# Altium PCB Revolution.PcbDoc
Units mil, origin at the board's own origin, x right, y up, seen from the top; angles counter-clockwise.
Board outline 1417.32 x 1417.32 mil, 4 copper layers (Top Layer, Power, Ground, Bottom Layer), stack 89.2 mil thick; 88 components, 82 nets, 359 pads, 101 vias.
Unrouted connection lines stored in the file: 44.
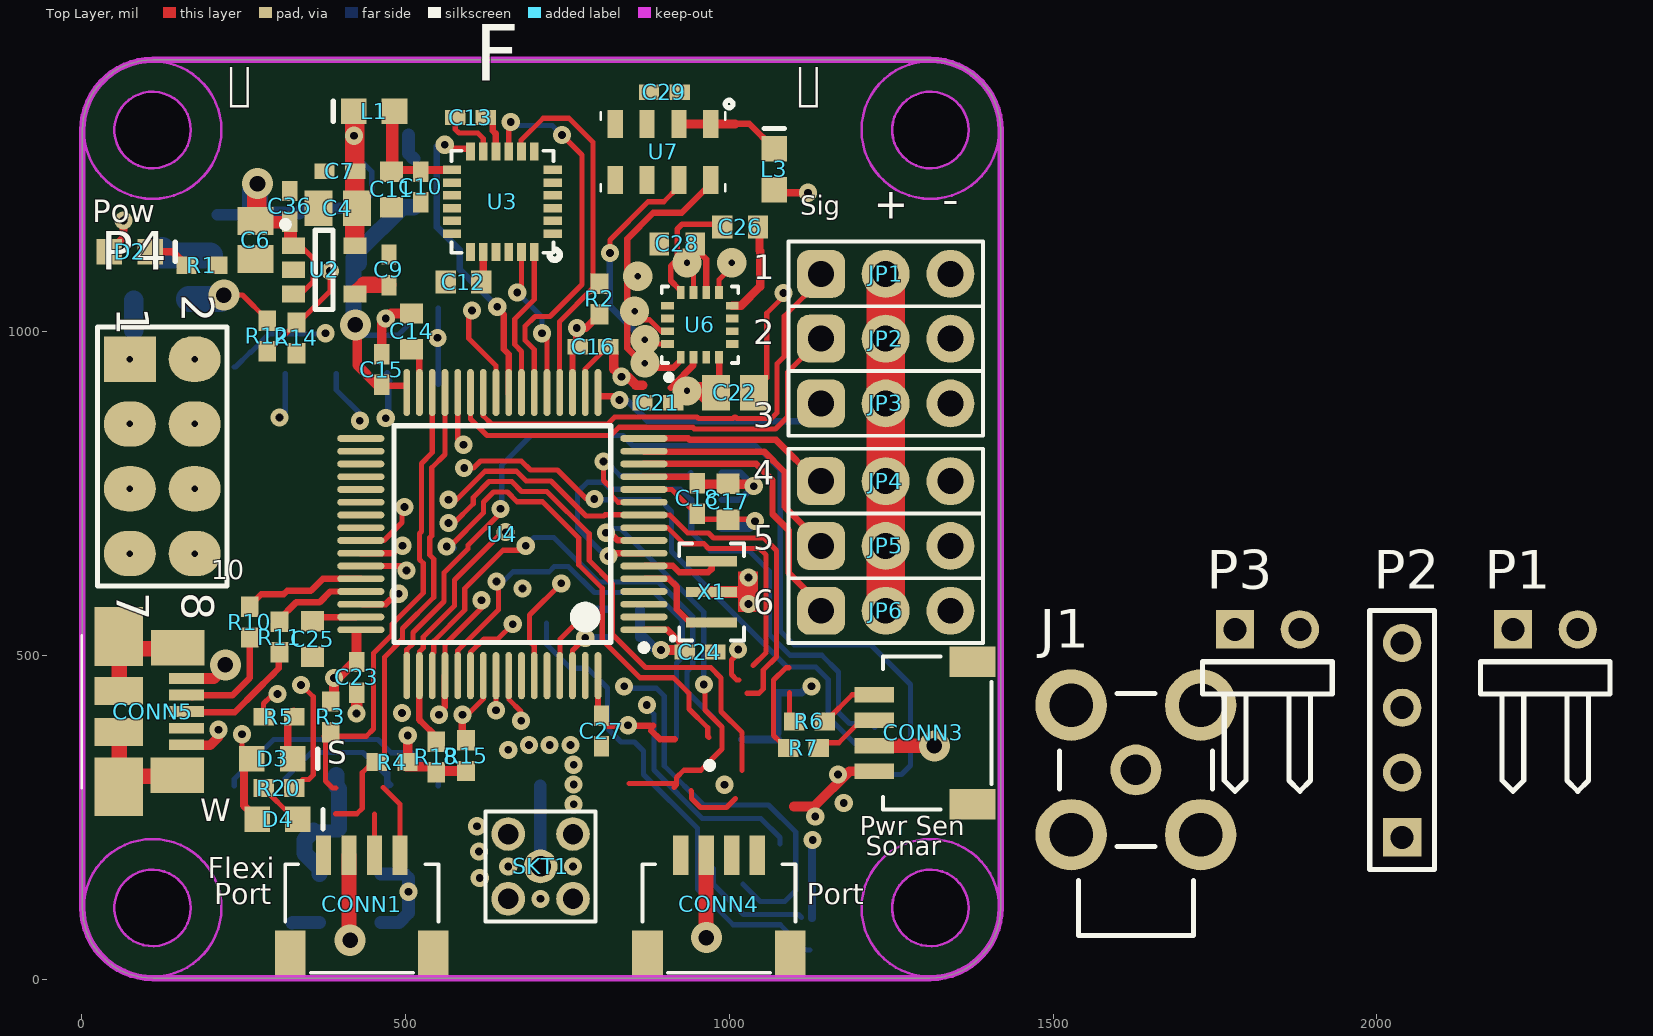
[diagram p0: Top Layer view]
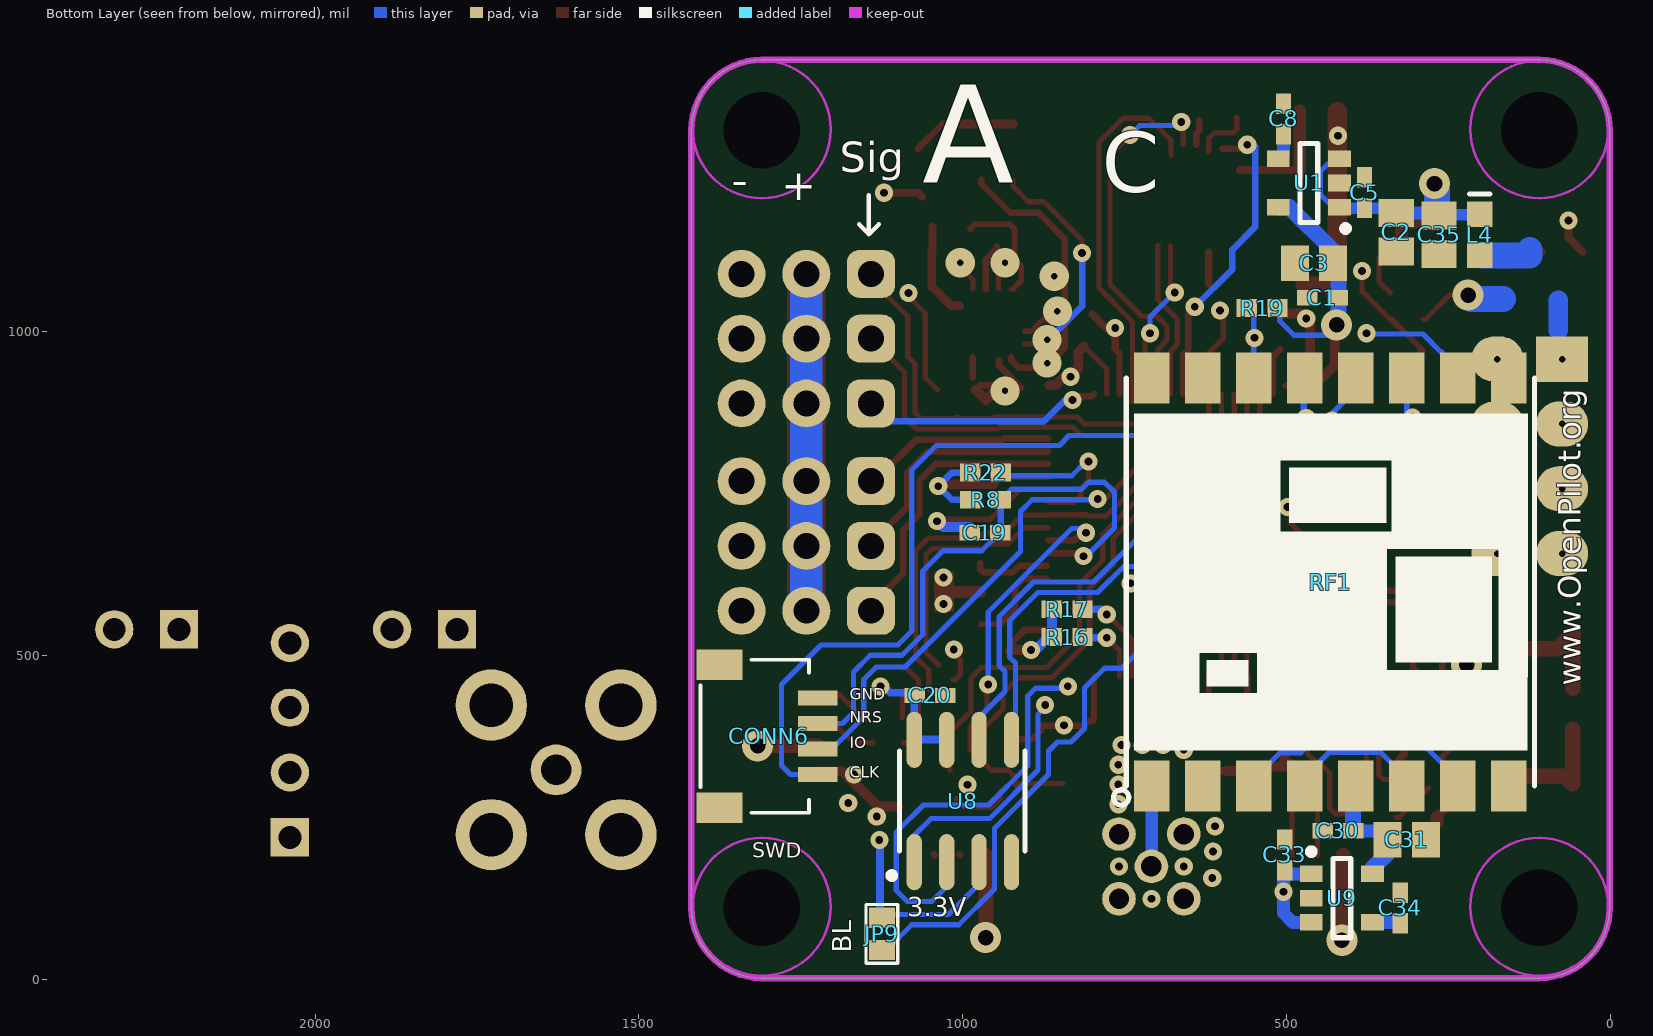
[diagram p1: Bottom Layer view, seen from below]
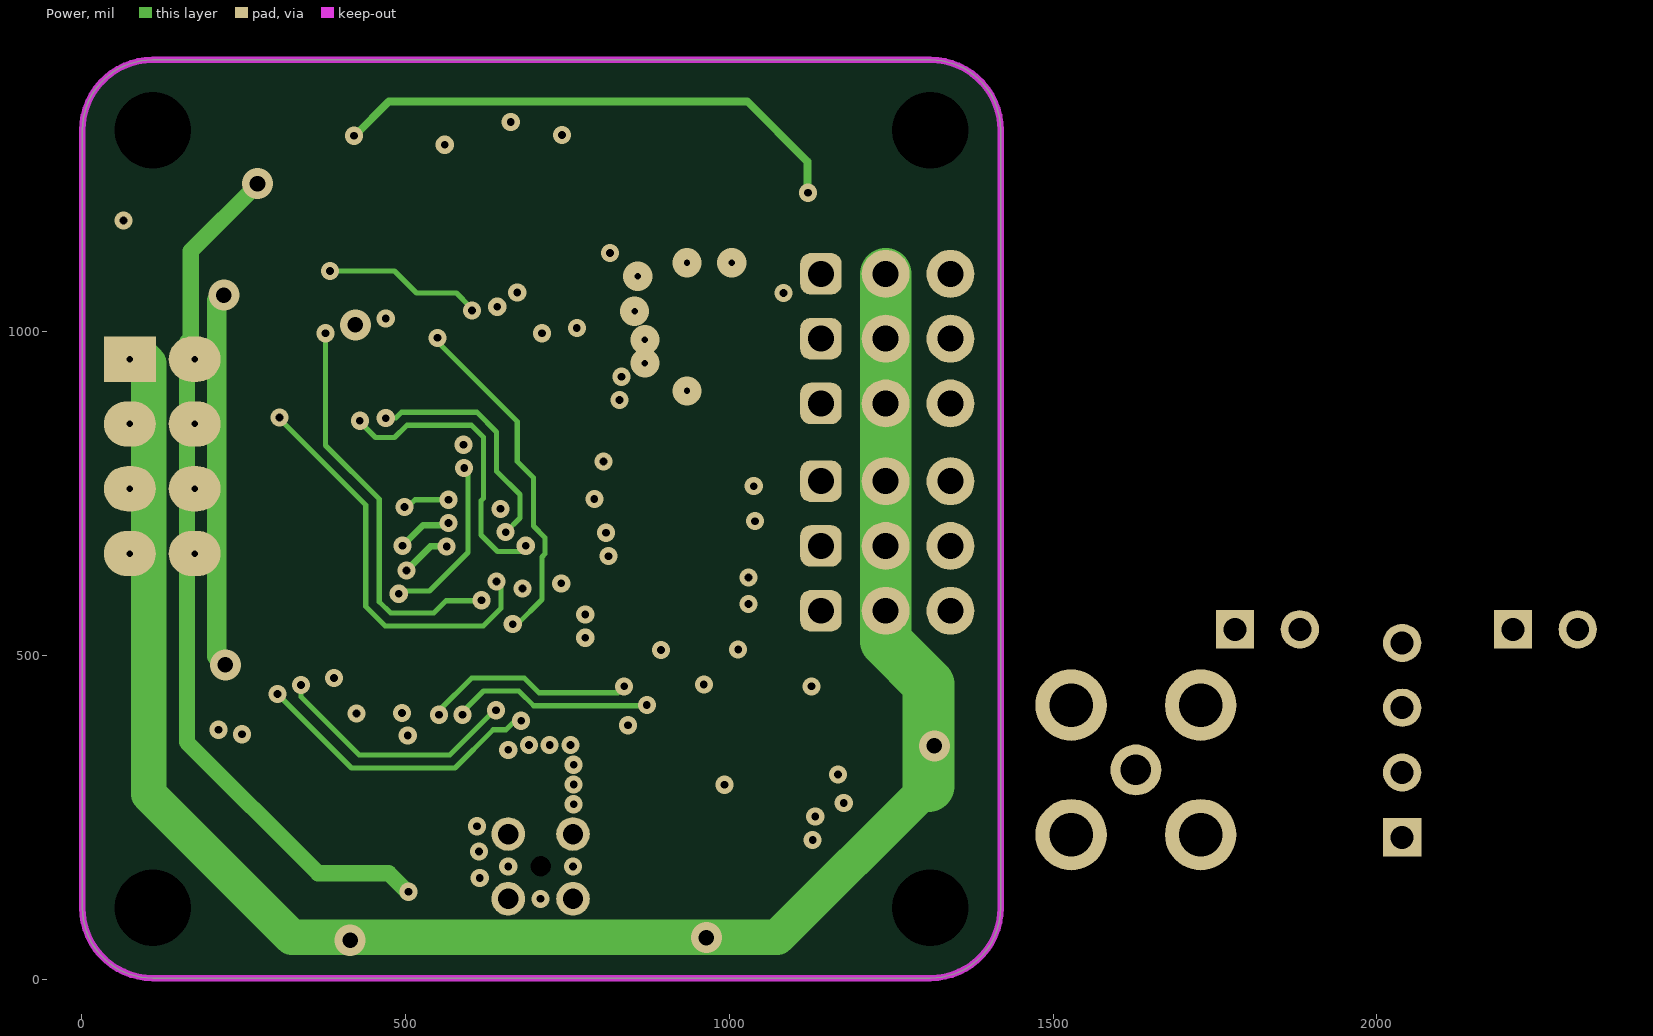
[diagram p2: Power]
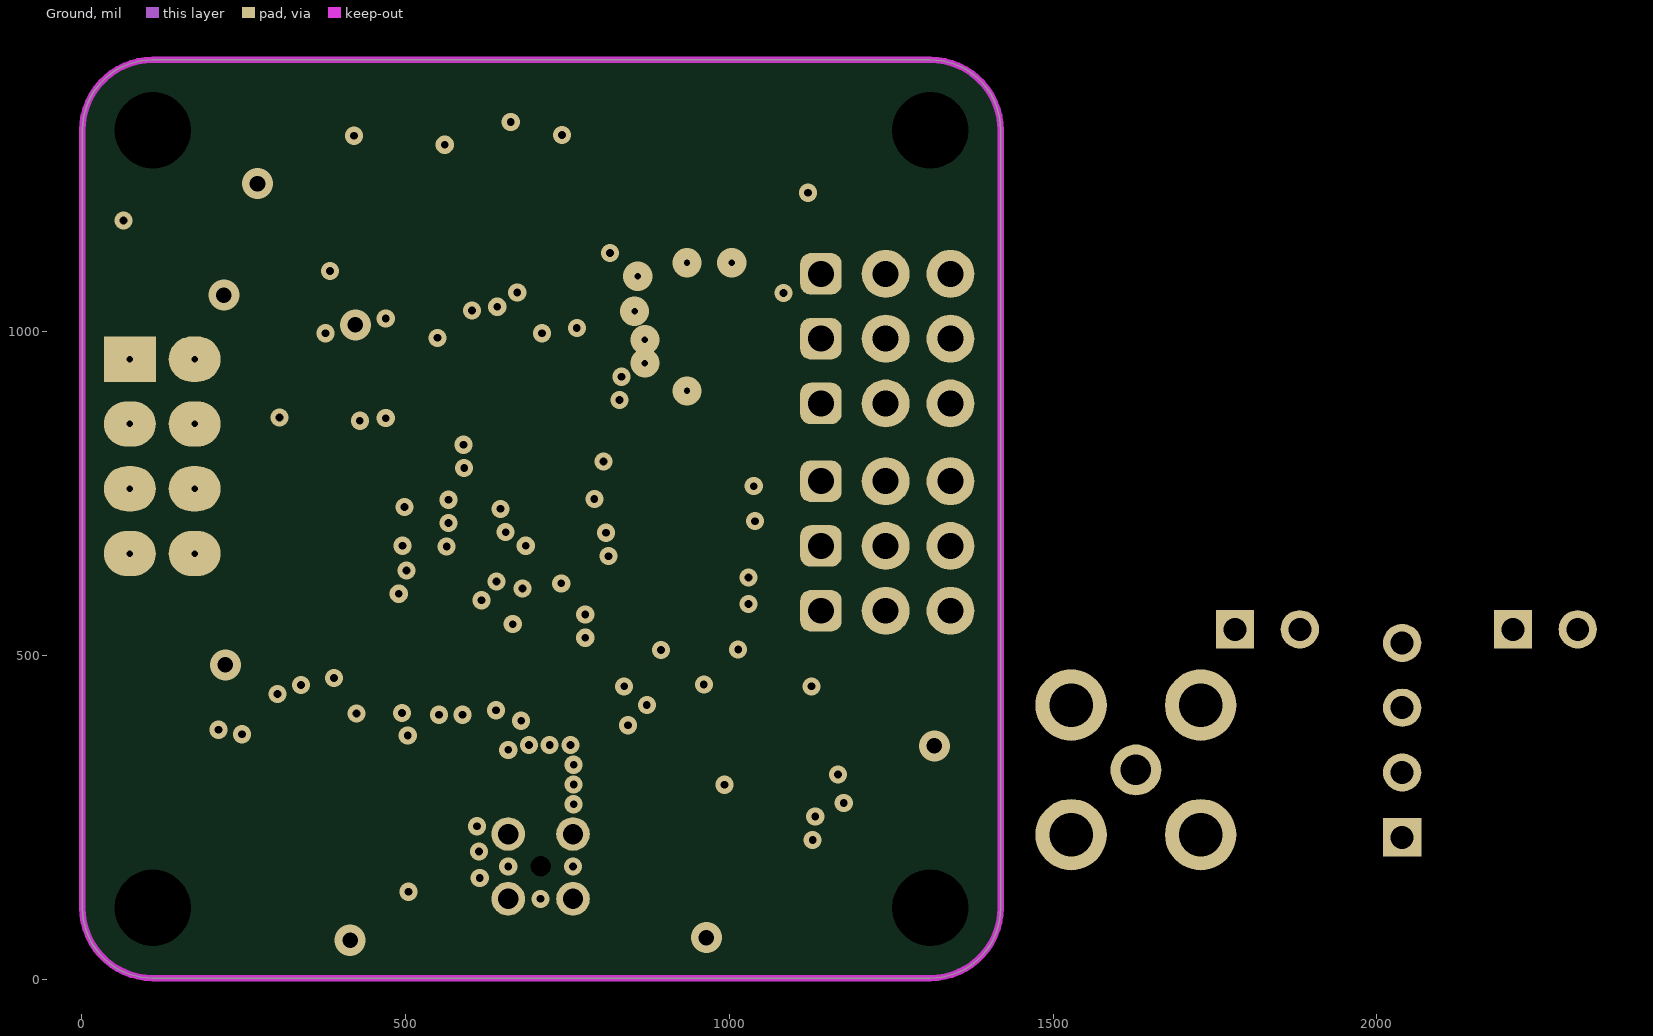
[diagram p3: Ground]
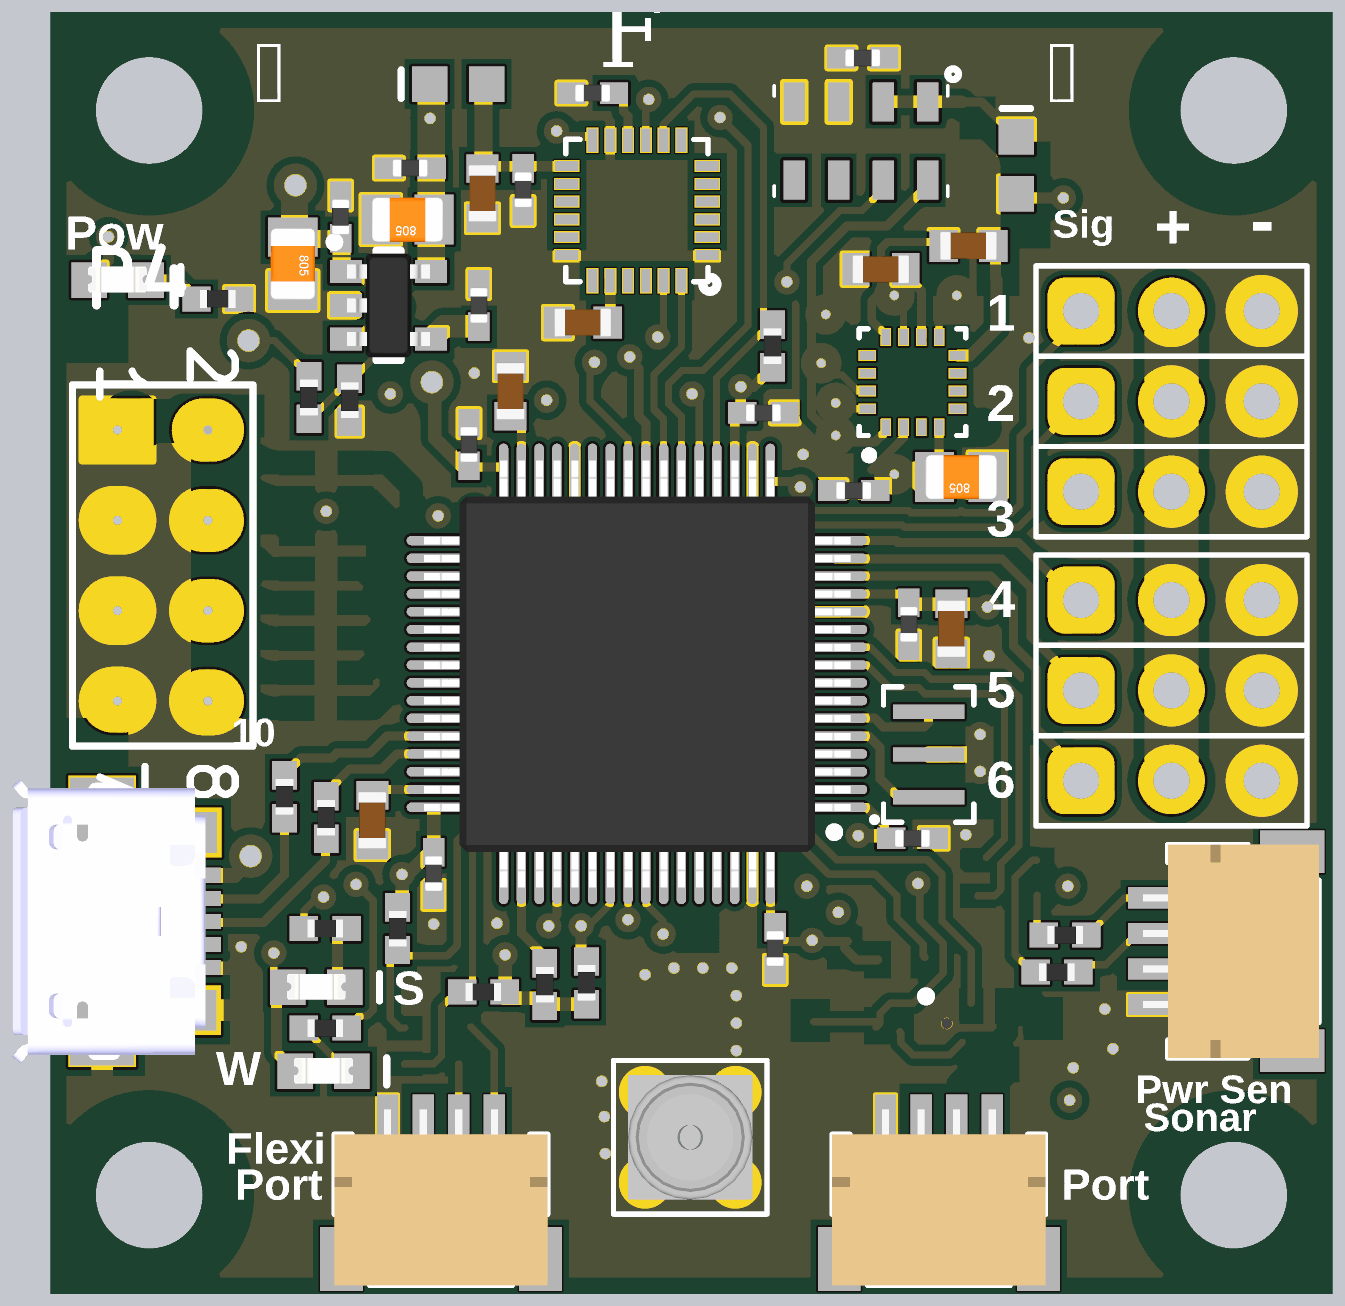
[diagram p4: 3D render of the assembled board from above, using the file's embedded part models]
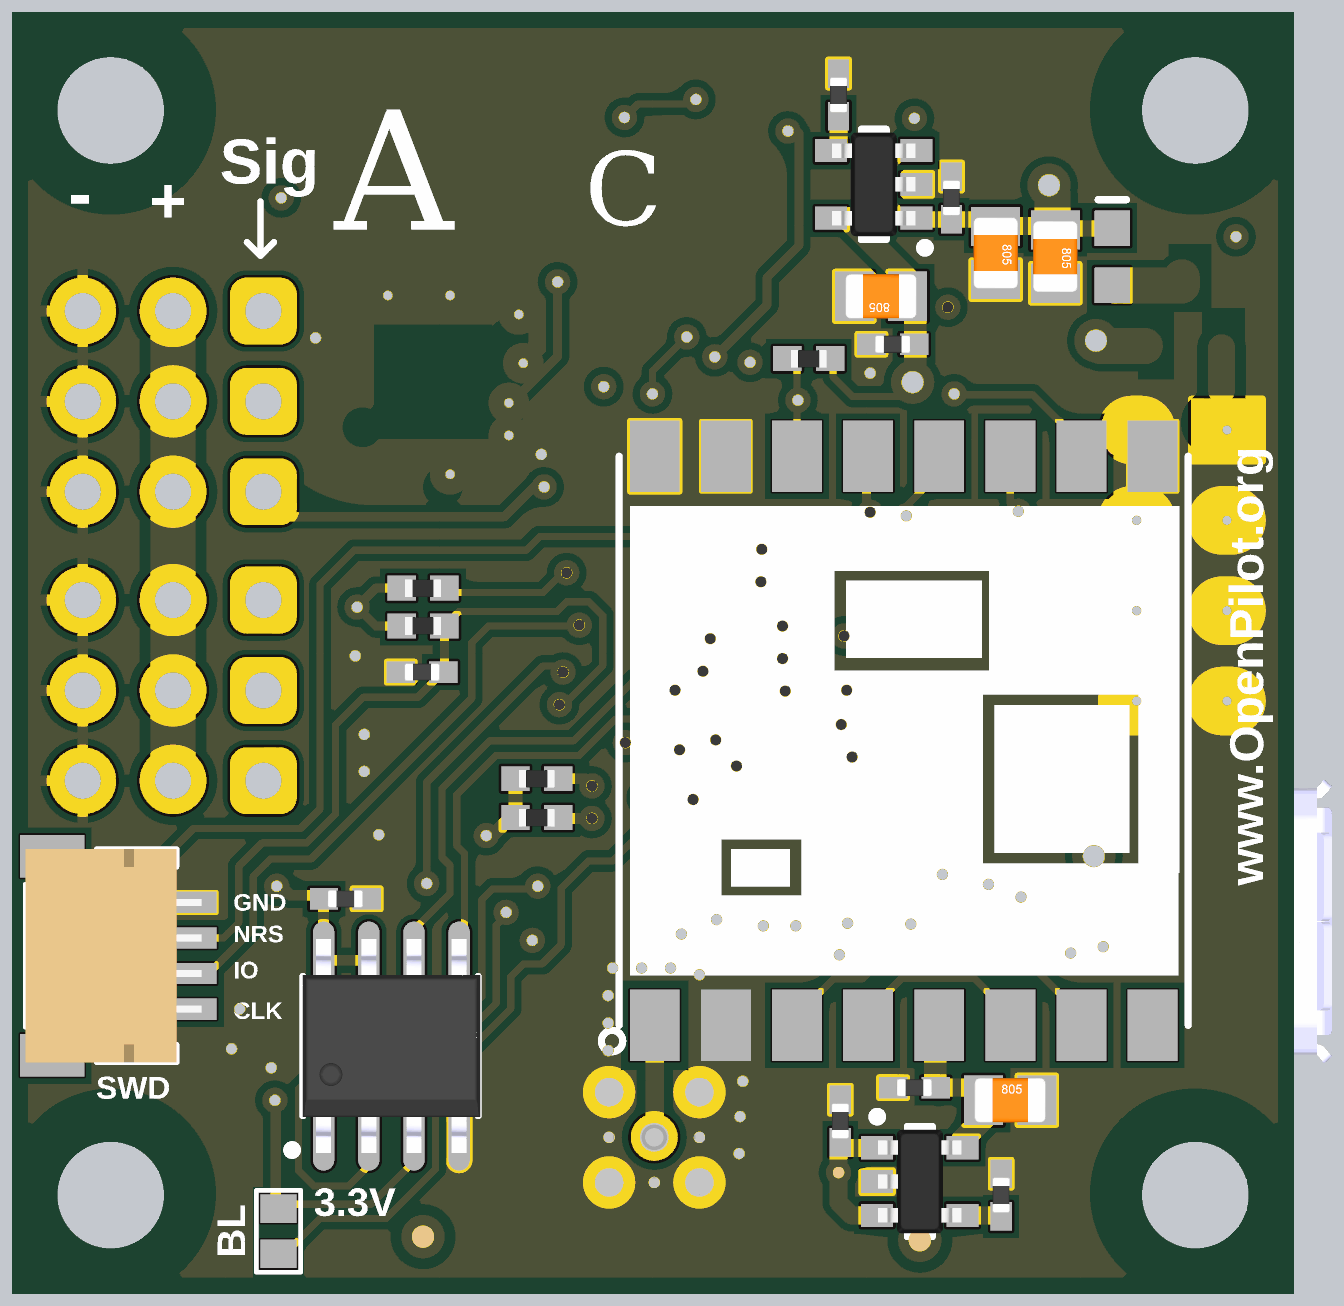
[diagram p5: 3D render of the assembled board from below, using the file's embedded part models]

## Layer stack, top to bottom
Top Solder: solder mask 0.4, Solder Resist, Dk 3.5
Top Layer: signal copper 1.4
Dielectric1: core 58.4, FR-4, Dk 4.8
Power: signal copper 1.4
Dielectric3: prepreg 12.6, FR-4, Dk 4.8
Ground: signal copper 1.4
Dielectric2: core 12.6, FR-4, Dk 4.8
Bottom Layer: signal copper 1.4
Bottom Solder: solder mask 0.4, Solder Resist, Dk 3.5

## Board outline
1.73,110 ccw(c110,110) 110,1.73 1310.79,1.73 ccw(c1310.79,110) 1419.06,110 1419.06,1310.79 ccw(c1310.79,1310.79) 1310.79,1419.06 110,1419.06 ccw(c110,1310.79) 1.73,1310.79

## Design rules (kind name [scope] priority, off if disabled: settings)
AcuteAngle [All] p1: minimum=6.00000000000000E+0001 checktracksonly=FALSE
Clearance CPWG [InNet('ANT') vs InPolygon] p1: gap=10
Clearance Clearance_osc [InNet('GND') vs InNet('OSC_IN') or InNet('OSC_OUT')] p2: gap=15
Clearance "Power Layer Pull Back" [OnLayer('Power') vs OnLayer('Keep-Out Layer')] p3: gap=30
Clearance Clearance_outline [All vs OnLayer('Keep-Out Layer')] p4: gap=12
Clearance "PWR Layer clearance" [All vs OnLayer('Power')] p5: gap=12
Clearance "VCC_UNREG Pour Clearance" [(InNamedPolygon('Top Layer-GND') OR InNamedPolygon('Bottom Layer-GND')) vs (InNet('VCC_UNREG'))] p6: gap=12
Clearance "Small Part Clearance Poly" [(HasFootprint('IMU-3000') OR HasFootprint('LPCC-16')) vs InPolygon] p7: gap=8
Clearance "Small Part Clearance" [(HasFootprint('IMU-3000') OR HasFootprint('LPCC-16'))] p8: gap=6
Clearance [All] p9: gap=8
ComponentClearance ComponentClearance_servo_headers [InComponent('JP1') or InComponent('JP2') or InComponent('JP3') or InComponent('JP4') or InComponent('JP5') or InComponent('JP6')] p1: gap=5 collisioncheckmode=3 verticalgap=10 showdistances=FALSE
ComponentClearance [All] p2: gap=10 collisioncheckmode=3 verticalgap=10 showdistances=FALSE
DiffPairsRouting [All] p1: maxlimit=20 minlimit=6 mostfreqgap=10 toplayer_minwidth=15 toplayer_maxwidth=15 toplayer_prefwidth=15 midlayer1_mingap=10 midlayer1_maxgap=10 midlayer1_minwidth=15 midlayer1_maxwidth=15 midlayer1_prefwidth=15 midlayer2_mingap=10 midlayer2_maxgap=10 midlayer2_minwidth=15 midlayer2_maxwidth=15 midlayer2_prefwidth=15 bottomlayer_minwidth=15 bottomlayer_maxwidth=15 bottomlayer_prefwidth=15 maxuncoupledlength=500
HoleSize [All] p1: absolutevalues=TRUE maxlimit=1000 minlimit=12 maxpercent=80.000 minpercent=20.000
MinimumAnnularRing [All] p1: minimumring=8
MinimumSolderMaskSliver MinimumSolderMaskSliver_FIL1-3 [InComponent('FIL1') or InComponent('FIL2') or InComponent('FIL3')] p1: minsoldermaskwidth=1
MinimumSolderMaskSliver [All] p2: minsoldermaskwidth=3
PlaneClearance [All] p1: clearance=15
PlaneConnect [All] p1: planeconnectstyle=Direct reliefexpansion=20 reliefentries=4 reliefconductorwidth=10 reliefairgap=10
PolygonConnect PolygonConnect_Headers [(HasFootprint('SIP3 - 0.1')) vs IsNamedPolygon('Bottom Layer-GND')] p1: connectstyle=Relief reliefconductorwidth=12 reliefentries=4 polygonreliefangle="90 Angle" airgapwidth=10
PolygonConnect PolygonConnect_usb [HasFootprint('Micro_USB')] p2: connectstyle=Relief reliefconductorwidth=24 reliefentries=4 polygonreliefangle="90 Angle" airgapwidth=10
PolygonConnect [All] p3: connectstyle=Direct reliefconductorwidth=12 reliefentries=4 polygonreliefangle="90 Angle" airgapwidth=10
RoutingVias [All] p1: holewidth=12 width=28 viastyle="Through Hole" minholewidth=12 minwidth=28 maxholewidth=28 maxwidth=50
SilkToSilkClearance SilkToSilkClearance_text [IsText] p1: silktosilkclearance=0
SilkToSilkClearance [All] p2: silktosilkclearance=4
SilkToSolderMaskClearance SilkscreenOverComponentPads [IsPad] p1: minsilkscreentomaskgap=2 clearancetoexposedcopper=TRUE
SolderMaskExpansion [All] p1: expansion=3
Width [All] p1: maxlimit=400 minlimit=8 preferedwidth=10
22 further rules are at their usual default settings.

## Classes and differential pairs
differential pair USB_R: +USB_R_P -USB_R_N

## Components (designator, comment, footprint, x,y, rotation, side; value= is the part's Value field where it differs from the comment)
C1 "10n" CAP402N 445,1052 r0 bottom
C2 "Cap805" CAP805L#1 331,1153 r270 bottom
C3 "Cap805" CAP805L#2 458,1105 r0 bottom
C4 "Cap805" CAP805L#2 396,1190 r180 top
C5 "10n" CAP402N 380,1214 r90 bottom
C6 "Cap805" CAP805L#2 269,1141 r270 top
C7 "10n" CAP402N 399,1247 r180 top
C8 "10n" CAP402N 505,1328 r90 bottom
C9 "10n" CAP402N 475,1095 r90 top
C10 "Cap402" CAP402N 524,1223 r90 top
C11 "Cap603" CAP603L#1 479,1219 r270 top
C12 "Cap603" CAP603L#1 590,1076 r0 top
C13 "Cap402" CAP402N 601,1330 r180 top
C14 "Cap603" CAP603L#1 510,1000 r270 top
C15 "Cap402" CAP402N 464,941 r90 top
C16 "Cap402" CAP402N 790,976 r180 top
C17 "Cap603" CAP603L#1 998,737 r90 top
C18 "10n" CAP402N 951,742 r270 top
C19 "Cap402" CAP402N 966,689 r180 bottom
C20 "Cap402" CAP402N 1051,438 r0 bottom
C21 "Cap402" CAP402N 890,890 r180 top
C22 "Cap805" CAP805L#2 1009,905 r180 top
C23 "Cap402" CAP402N 425,466 r270 top
C24 "Cap402" CAP402N 955,505 r180 top
C25 "Cap603" CAP603L#1 357,525 r90 top
C26 "Cap603" CAP603L#1 1017,1161 r0 top
C27 "Cap402" CAP402N 803,383 r270 top
C28 "Cap603" CAP603L#2 920,1135 r180 top
C29 "Cap402" CAP402N 900,1369 r180 top
C30 "10n" CAP402N 421,229 r0 bottom
C31 "Cap805" CAP805L#2 315,215 r180 bottom
C33 "Cap402" CAP402N 503,192 r270 bottom
C34 "10n" CAP402N 325,110 r90 bottom
C35 "Cap805" CAP805L#1 265,1149 r270 bottom
C36 "10n" CAP402N 322,1193 r90 top
CONN1 "Flexi Port" "JST SH 4 Pin Side Entry" 433.07,10 r0 top locked
CONN3 "Current / Volt Sens & Sonar" "JST SH 4 Pin Side Entry" 1405,380 r90 top
CONN4 "Main USART" "JST SH 4 Pin Side Entry" 984.25,10 r0 top locked
CONN5 "Micro USB B" Micro_USB 58,413 r270 top
CONN6 "SWD" "JST SH 4 Pin Side Entry" 1405,375 r270 bottom
D2 "Green" LED603N 75,1123 r180 top
D3 "STAT" LED603N 295,340 r180 top
D4 "WARN" LED603N 303,247 r180 top
J1 "COAX-F" MCX5.08-H5 1628,323 r90 top
JP1 "Servo out 1" "SIP3 - 0.1" 1141.73,1088.73 r0 top locked
JP2 "Servo out 2" "SIP3 - 0.1" 1141.73,988.73 r0 top locked
JP3 "Servo out 3" "SIP3 - 0.1" 1141.73,888.73 r0 top locked
JP4 "Servo out 4" "SIP3 - 0.1" 1141.73,768.73 r0 top locked
JP5 "Servo out 5 & Govenor Input" "SIP3 - 0.1" 1141.73,668.73 r0 top locked
JP6 "Servo out 6" "SIP3 - 0.1" 1141.73,568.73 r0 top locked
JP9 "SBL" "TOUCH JMP 2PAD" 1125,70 r0 bottom
L1 "FB 300mA" IND603N 452,1340 r0 top
L3 "FB 300mA" IND603N 1070,1250 r270 top
L4 "FB 300mA" IND603N 202,1149 r270 bottom
P1 "Header 2H" HDR1X2H 2210,540 r0 top
P2 "Header 4" HDR1X4 2039,219 r90 top
P3 "Header 2H" HDR1X2H 1781,540 r0 top
P4 "Header 4X2" HDR2X4 75,957 r270 top
R1 "Res402" RES402N 186,1102 r180 top
R2 "Res402" RES402N 800,1050 r90 top
R3 "Res402" RES402N 385,405 r90 top
R4 "Res402" RES402N 480,335 r0 top
R5 "Res402" RES402N 305,405 r180 top
R6 "Res402" RES402N 1124,398 r0 top
R7 "Res402" RES402N 1115,357 r0 top
R8 "Res402" RES402N 965,740 r0 bottom
R10 "Res402" RES402N 260,551 r270 top
R11 "Res402" RES402N 306,528 r270 top
R12 "Res402" RES402N 287,993 r270 top
R14 "Res402" RES402N 332,990 r90 top
R15 "Res402" RES402N 594,345 r90 top
R16 "Res402" RES402N 839,528 r180 bottom
R17 "Res402" RES402N 839,571 r180 bottom
R18 "Res402" RES402N 548,343 r90 top
R19 "Res402" RES402N 538,1036 r180 bottom
R20 "Res402" RES402N 305,295 r0 top
R22 "Res402" RES402N 965,782 r180 bottom
RF1 "RFM22B-S2" RFM22-S2 432.89,613 r90 bottom locked
SKT1 "MMCX Thru hole" MMCX_SOCKET 709,174 r90 top
U1 "REG113NA-3.3" SOT23-5L 466,1229 r0 bottom
U2 "REG113NA-3.3" SOT23-5L 375,1095 r0 top
U3 "MPU-6000" IMU-3000 650,1200 r180 top
U4 "STM32F405RGT6" "STM32 64 Lead" 650,687 r180 top
U6 "HMC5883L" LPCC-16 955,1010 r90 top
U7 "Pressure Sensor" MS5611-01BA03 898,1277 r270 top
U8 "Flash 16Mbits" SOIC8_N 1000,275 r90 bottom
U9 "REG113NA-3.3" SOT23-5L 415,125 r180 bottom
X1 "8Mhz Ceralock" "CERALOCK 8Mhz" 973,597.76 r90 top

## Footprints (in the part's own frame and the unit in brackets; to place one, negate y for a bottom-side part, rotate by r counter-clockwise, add the part's x,y. Pads: shape width x height; smd on the part's side, far side on the other; paste and mask are expansions set on the pad)
CAP402N [mm] "Chip Capacitor, Body 1.0x0.5mm, IPC Medium Density"
  rect 0.8x0.6 smd: 1(-0.6,0) 2(0.6,0)
  body extent -0.5,-0.25 0.5,0.25, height 0.6
CAP603L#1 [mm] "Chip Capacitor, Body 1.6x0.8mm, IPC High Density"
  rect 0.8x0.9 smd: 1(-0.7,0) 2(0.7,0)
  body extent -0.8,-0.4 0.8,0.4, height 0.77
CAP603L#2 [mm] "Chip Capacitor, Body 1.6x0.8mm, IPC High Density"
  rect 0.762x0.9 smd: 1(-0.7,0) 2(0.7,0)
  body extent -0.8,-0.4 0.8,0.4, height 0.77
CAP805L#1 [mm] "Chip Capacitor, Body 2.0x1.3mm, IPC High Density"
  rect 1.1x1.38 smd: 1(-0.75,0) 2(0.75,0)
  body extent -1,-0.62 1,0.63, height 0.78
CAP805L#2 [mm] "Chip Capacitor, Body 2.0x1.3mm, IPC High Density"
  rect 1.1x1.4 smd: 1(-0.75,0) 2(0.75,0)
  body extent -1,-0.62 1,0.63, height 0.78
"CERALOCK 8Mhz" [mm] "Digikey 490-1195-1-ND"
  rect 0.4x2 smd: 1(-1.2,0) 2(1.2,0) 3(0,0)
  silkscreen extent -1.91,-1.27 1.91,1.58, body extent -1.78,-1.14 1.78,1.14, height 0.5
HDR1X2H [mm] "Connector; Header; 2 Position; Right Angle"
  rect 1.5x1.5 hole 0.9: 1(0,0)
  round 1.5 hole 0.9: 2(2.54,0)
  silkscreen extent -1.27,-6.35 3.81,-1.27
HDR1X4 [mm] "Connector; Header; 4 Position"
  rect 1.5x1.5 hole 0.9: 1(0,0)
  round 1.5 hole 0.9: 2(2.54,0) 3(5.08,0) 4(7.62,0)
  silkscreen extent -1.27,-1.27 8.89,1.27
HDR2X4 [mil] "Connector; Header; 4x2 Position"
  rect 70x80 hole 10: 1(0,0)
  oval 70x80 hole 10: 2(0,100) 3(100,0) 4(100,100) 5(200,0) 6(200,100) 7(300,0) 8(300,100)
  silkscreen extent -50,-50 350,150
IMU-3000 [mm]
  rect 0.711x0.337 smd paste-0.03 mask+0.04: 1(-1.975,1.25) 2(-1.975,0.75) 3(-1.975,0.25) 4(-1.975,-0.25) 5(-1.975,-0.75) 6(-1.975,-1.25) 13(1.975,-1.25) 14(1.975,-0.75) 15(1.975,-0.25) 16(1.975,0.25) 17(1.975,0.75) 18(1.975,1.25)
  rect 0.337x0.711 smd paste-0.03 mask+0.04: 7(-1.25,-1.975) 8(-0.75,-1.975) 9(-0.25,-1.975) 10(0.25,-1.975) 11(0.75,-1.975) 12(1.25,-1.975) 19(1.25,1.975) 20(0.75,1.975) 21(0.25,1.975) 22(-0.25,1.975) 23(-0.75,1.975) 24(-1.25,1.975)
  silkscreen extent -2.25,-2 2,2.27, body extent -2,-2 2,2, height 0.95
IND603N [mm] "Chip Inductor, Body 1.6x0.8mm, IPC Medium Density"
  rect 1x1 smd: 1(-0.8,0) 2(0.8,0)
  silkscreen extent -1.6,-0.4 -1.6,0.4, body extent -0.87,-0.48 0.87,0.48, height 0.71
"JST SH 4 Pin Side Entry" [mm] "SM04B-SRSS-TB"
  rect 1.2x1.8 smd paste+0 mask+0.051: 0(-2.8,0.75) 0(2.8,0.75)
  rect 0.6x1.55 smd paste+0 mask+0.051: 1(-1.5,4.6) 2(-0.5,4.6) 3(0.5,4.6) 4(1.5,4.6)
  silkscreen extent -3,0 3,4.25, body extent -3,0 3,4.95, height 2.92
LED603N [mm] "Chip LED, Body 1.6x0.8mm, IPC Medium Density"
  rect 1x1 smd: 1(-0.8,0) 2(0.8,0)
  silkscreen extent -1.78,-0.38 -1.78,0.38, body extent -0.82,-0.38 0.82,0.34, height 0.68
LPCC-16 [mm] "Honeywell 16 lead LPCC pakcage"
  rect 0.5x0.3 smd paste-0.025 mask+0.056: 1(-1.27,0.75) 2(-1.27,0.25) 4(-1.27,-0.75) 9(1.27,-0.75) 10(1.27,-0.25) 11(1.27,0.25) 12(1.27,0.75)
  rect 0.5x0.3 smd paste-0.025 mask+0.064: 3(-1.27,-0.25)
  rect 0.3x0.5 smd paste-0.025 mask+0.056: 5(-0.75,-1.27) 6(-0.25,-1.27) 7(0.25,-1.27) 8(0.75,-1.27) 13(0.75,1.27) 14(0.25,1.27) 15(-0.25,1.27) 16(-0.75,1.27)
  silkscreen extent -2.16,-1.5 1.5,1.5, body extent -1.5,-1.5 1.5,1.5, height 0.9
MCX5.08-H5 [mm] "Connector; RF Coaxial, MCX, Thru-Hole; 5 Position; Right-Angle"
  round 2 hole 1.2: 1(0,0)
  round 2.8 hole 1.7: 2(-2.54,-2.54) 3(2.54,-2.54) 4(2.54,2.54) 5(-2.54,2.54)
  silkscreen extent -6.5,-3 3,3
Micro_USB [mm] "Digikey WM17141CT-ND"
  rect 2.3x1.9 smd paste-0.051: 0(-2.946,0) 0(2.946,0)
  rect 1.4x2.1 smd paste-0.127: 0(-2.5,2.311) 0(2.5,2.286)
  rect 1.1x1.9 smd paste-0.203: 0(-0.8,0) 0(0.8,0)
  rect 0.425x1.38 smd mask+0.064: 1(-1.3,2.65) 2(-0.65,2.65) 3(0,2.65) 4(0.65,2.65) 5(1.3,2.65)
  silkscreen extent -3,-1.45 3,-1.45, body extent -3.99,-2.53 3.99,2.9, height 2.69
MMCX_SOCKET [mil] "Digikey ARF1729-ND and 07248"
  round 52 / inner round 0 / far side round 52 hole 31.5: 1(0,0)
  round 52 hole 31.5: 2(-50,-50) 2(-50,50) 2(50,-50) 2(50,50)
  silkscreen extent -85,-85 85,85, body extent -69,-69 69,69, height 177
MS5611-01BA03 [mm] "MS5611-01BA03 Pressure Sensor"
  rect 1.1x0.6 smd mask+0.1: 1(-1.1,1.875) 2(-1.1,0.625) 3(-1.1,-0.625) 4(-1.1,-1.875) 5(1.1,-1.875) 6(1.1,-0.625) 7(1.1,0.625) 8(1.1,1.875)
  silkscreen extent -2.03,-2.44 1.55,2.74, body extent -1.5,-2.36 1.5,2.36, height 1.02
RES402N [mm] "Chip Resistor, Body 1.1x0.5mm, IPC Medium Density"
  rect 0.8x0.7 smd: 1(-0.6,0) 2(0.6,0)
  body extent -0.5,-0.25 0.5,0.25, height 0.27
RFM22-S2 [mm] "SMT RFM22"
  rect 2x1.4 smd mask+0.051: 1(-8,7) 3(-8,3) 4(-8,1) 5(-8,-1) 6(-8,-3) 7(-8,-5) 8(-8,-7) 9(8,-7) 10(8,-5) 11(8,-3) 12(8,-1) 13(8,1) 14(8,3) 15(8,5)
  rect 2x1.4 smd mask+0: 2(-8,5)
  rect 2x1.4 smd: 16(8,7)
  silkscreen extent -8.74,-8 8,8.5, body extent -8.1,-8 8,8.05, height 1.9
"SIP3 - 0.1" [mil] "Standard 0.1 3 Pin Header"
  rrect50% 74x74 / inner rrect50% 64x64 / far side rrect50% 74x74 hole 40: 1(0,0)
  round 74 hole 40: 2(100,0) 3(200,0)
  silkscreen extent -50,-50 250,50, body extent -47,-47 248,47, height 394
SOIC8_N [mm] "8-Pin Small Outline Integrated Circuit Package (SOIC8), IPC Medium Density"
  oval 2.2x0.6 smd: 1(-2.4,1.905) 2(-2.4,0.635) 3(-2.4,-0.635) 4(-2.4,-1.905) 5(2.4,-1.905) 6(2.4,-0.635) 7(2.4,0.635) 8(2.4,1.905)
  silkscreen extent -3.05,-2.44 1.96,2.92, body extent -3.01,-2.5 3.01,2.5, height 1.75
SOT23-5L [mm] "SOT23, 5-Leads, Body 2.9x1.6mm, Pitch 0.95mm, Lead Span 2.8mm, IPC High Density"
  rect 0.9x0.65 smd mask+0.076: 1(-1.2,0.95) 2(-1.2,0) 3(-1.2,-0.95) 4(1.2,-0.95) 5(1.2,0.95)
  silkscreen extent -1.56,-1.55 0.35,1.91, body extent -1.17,-1.46 1.17,1.46, height 0.97
"STM32 64 Lead" [mm] "Thin QFP, 64-Leads, Body 10x10mm, Pitch 0.5mm, IPC Medium Density"
  oval 1.85x0.265 smd mask+0.076: 1(-5.55,3.75) 2(-5.55,3.25) 3(-5.55,2.75) 4(-5.55,2.25) 5(-5.55,1.75) 6(-5.55,1.25) 7(-5.55,0.75) 8(-5.55,0.25) 9(-5.55,-0.25) 10(-5.55,-0.75) 11(-5.55,-1.25) 12(-5.55,-1.75) 13(-5.55,-2.25) 14(-5.55,-2.75) 15(-5.55,-3.25) 16(-5.55,-3.75) 33(5.55,-3.75) 34(5.55,-3.25) 35(5.55,-2.75) 36(5.55,-2.25) 37(5.55,-1.75) 38(5.55,-1.25) 39(5.55,-0.75) 40(5.55,-0.25) 41(5.55,0.25) 42(5.55,0.75) 43(5.55,1.25) 44(5.55,1.75) 45(5.55,2.25) 46(5.55,2.75) 47(5.55,3.25) 48(5.55,3.75)
  oval 0.265x1.85 smd mask+0.076: 17(-3.75,-5.55) 18(-3.25,-5.55) 19(-2.75,-5.55) 20(-2.25,-5.55) 21(-1.75,-5.55) 22(-1.25,-5.55) 23(-0.75,-5.55) 24(-0.25,-5.55) 25(0.25,-5.55) 26(0.75,-5.55) 27(1.25,-5.55) 28(1.75,-5.55) 29(2.25,-5.55) 30(2.75,-5.55) 31(3.25,-5.55) 32(3.75,-5.55) 49(3.75,5.55) 50(3.25,5.55) 51(2.75,5.55) 52(2.25,5.55) 53(1.75,5.55) 54(1.25,5.55) 55(0.75,5.55) 56(0.25,5.55) 57(-0.25,5.55) 58(-0.75,5.55) 59(-1.25,5.55) 60(-1.75,5.55) 61(-2.25,5.55) 62(-2.75,5.55) 63(-3.25,5.55) 64(-3.75,5.55)
  silkscreen extent -5.68,-4.25 4.25,4.57, body extent -6.01,-5.99 5.99,6.01, height 1.7
"TOUCH JMP 2PAD" [mil] "Touch Jumper 2 Pad"
  rect 40x31.5 smd mask+2: 1(0,25) 2(0,-25)
  silkscreen extent -25,-45 25,45

## Part data
C1 C5 C7 C8 C9 C18 C30 C34 C36: library part Cap402, "Capacitor SMD"
C2 C3 C4 C6 C10 C11 C12 C13 C14 C15 C16 C17 C19 C20 C21 C22 C23 C24 C25 C26 C27 C28 C29 C31 C33 C35: "Capacitor SMD"
CONN1 CONN3 CONN4 CONN6: library part "JST-SH 4-pin Side Entry Socket", "JST-SH 4-pin Side Entry Socket"
CONN5: library part "USB Micro B SMT", "USB Micro B SMT Socket"
D2: library part "LED 603 Gr", "Green 603 LED"
D3: library part "LED 603 Bl", "Blue 603 LED"
D4: library part "LED 603 Or", "Orange 603 LED"
J1: "RF Coaxial PCB Connector, MCX; Thru-Hole, Right-Angle Mount Socket, Blunt Post Terminal, 50 Ohm Impedance"
JP1 JP2 JP3 JP4 JP5 JP6: library part "Hdr 3 Pin 0.1", "Header, 3-Pin, 0.1\""
JP9: library part "2 PAD Touch JMP", "2 Pad Touch Jumper"
L1 L3 L4: library part "FerriteBead 300mA", "Ferrite Bead 300mA"
P1 P3: "Header, 2-Pin, Right Angle"
P2: "Header, 4-Pin"
P4: "Header, 4-Pin, Dual row"
R1 R2 R3 R4 R5 R6 R7 R8 R10 R11 R12 R14 R15 R16 R17 R18 R19 R20 R22: "Resistor SMD"
RF1: "UHF 100mW Transceiver"
SKT1: "MMCX Socket"
U1 U2 U9: "3.3V 400mA LDO Regulator"
U3: library part MPU-3/6000, "Invensense MPU-3/6000,  3-axis Gyros & Accel on 6000"
U4: library part STM32F103RET6, "STM32 ARM-based 32-bit MCU with 1MB Flash, 64-pin LQFP, Industrial Temperature"
U6: "IC, Magnetometer, 3 axis, +/- 8 Oe, I2C, 160Hz"
U7: library part MS5611-01BA03, "Pressure Sensor - MS5611-01BA03"
U8: library part "Flash 16Mb 75MHZ 8SOIC", "16Mbit SPI Flash Memory"
X1: library part CERALOCK8, "Ceralock 8Mhz with caps"

## Free pads (board coordinates)
  round 0 hole 118.11 unplated: 0(110,110) 0(110,1310.79) 0(1310.79,110) 0(1310.79,1310.79)

## Via types
v1: diameter 28, hole 12, Top Layer to Bottom Layer, tented both sides, 87 vias
v2: diameter 48, hole 24, Top Layer to Bottom Layer, tented both sides, 7 vias
v3: diameter 45, hole 10, Top Layer to Bottom Layer, tented both sides, 7 vias

## Nets (pads, with @x,y where several pads share a name; then routed paths per layer and width w, separated by ;. In a path a pad name is that pad's centre, name@x,y a point inside that pad or via, vN(x,y) a via of type N, cw(c..) or ccw(c..) an arc to the next point about the centre after c; other vN are vias at no path point)
ANT: RF1.1 SKT1.1 | length 124.3
  Bottom Layer w19: SKT1.1@708.48,174.52 SKT1.1
  Bottom Layer w20: SKT1.1@708.48,174.52 RF1.1
CURRENT: R7.1 U4.9 | length 529.5
  Top Layer w8: U4.9 905.16,696.84 930,672 961.38,672 968.38,665 1047,665 1057,655 1057,504 1037,484 ; R7.1@1091.38,365 1080,365 1068.67,376.33 1068.67,461.67 1087.68,480.68 1092.48,480.68
GND: C1.2 C2.2 C3.2 C4.2 C5.2 C6.2 C7.2 C8.2 C9.2 C10.1 C11.2 C12.1 C13.2 C14.1 C15.2 C16.1 C17.1 C18.2 C19.1 C20.1 C21.2 C22.1 C23.2 C24.1 C25.1 C27.2 C28.2 C29.2 C30.2 C31.2 C33.1 C34.2 C35.2 C36.2 CONN1.1 CONN4.1 CONN5.0 CONN5.5 CONN6.1 JP1.3 JP2.3 JP3.3 JP4.3 JP5.3 JP6.3 P1.2 P2.4 P3.2 P4.7 P4.8 R1.1 R14.1 RF1.2 RF1.9 RF1.15 RF1.16 SKT1.2 U1.2 U2.2 U3.1 U3.11 U3.18 U4.12 U4.18 U4.28 U4.60 U4.63 U6.9 U6.11 U7.3 U7.4 U8.4 U9.2 X1.3 | length 1465.6
  Top Layer w8: C15.2@459,964.62 C15.2@464,969.62 ; C13.2 577.38,1311.62 583,1306 612,1306 620.47,1297.53 U3.11 ; U4.28@581.1,903.5 581.1,833.9 v1(590,825) ; U4.18@777.95,903.5 U4.18 777.95,941.95 808.71,972.71 C16.1@811.29,972.71 ; U4.12 911.48,755.9 957.38,710 1029,710 v1@1035,704 ; v3@940,1095 945.16,1089.84 U6.11@945.16,1065.2 ; U6.9@984.53,1065.2 984.53,1079.53 1004,1099 v3@1004,1107 ; C22.1@1039.53,910 1058,928.47 1058,1028 1082,1052 v1@1082,1057
  Top Layer w15: CONN5.5@174.41,361 199,361 212,374 v1(212,385) ; C25.1@355,492 C25.1@355,502.44 ; C23.2 C23.2@425,446.38 ; C15.2@464,969.62 464,1014 v1(470,1020) 477.56,1027.56 C14.1 ; C16.1 822,967.62 822,942 v1(834,930) 843,930 856,917 866.38,917
  Top Layer w18: v1(425,410) C23.2 ; X1.3 1027.76,597.76
  Top Layer w24: CONN5.0@58.67,386.09 58.67,301.59 CONN5.0@67.08,310 ; CONN5.0@58.67,449.09 58.67,525.33 58,526 58,529 58,534.26 82.26,510 143.65,510 CONN5.0@149.67,516.02 ; CONN5.0@67,313 CONN5.0@139.43,313 ; CONN5.0@139.5,310 CONN5.0@148.67,319.17
  Bottom Layer w15: C19.1@988.62,698 1031,698 v1(1040,707)
  other v1: 709,124 615,156 659,174 759,174 614,197 611,236 760.05,270 1177,272 760.05,300.47 760.05,330.93 659,354 691,361.4 723,361.4 755,361.4 495,411 1030,579 681,603 1030,620 1084,1059
  other v3: 935,1106 1004,1106
INV: U4.8 | length 668
  Top Layer w8: 845.55,302 914,302 ; 914.83,296 916.41,297.58 919,300.17 919,311.24 930.14,322.38 956.21,322.38 989,355.17 989,389.37 963,415.37 963,453 v1(961,455)
  Top Layer w10: v1(810,689) 816.18,689 828.03,677.16 U4.8
  Bottom Layer w8: v1@806.88,695.88 832.12,695.88 961,567 v1(961,455)
NetC8_1: C8.1 U1.4 | length 40.4
  Bottom Layer w20: C8.1@505,1303.38 505,1274.64 U1.4
NetC9_1: C9.1 U2.4 | length 58.1
  Top Layer w25: U2.4 436.65,1072 C9.1@474.38,1072
NetC10_2: C10.2 C11.1 L1.2 U3.13 | length 184.2
  Top Layer w10: C11.1@485,1253.62 C11.1@489.62,1249
  Top Layer w12: C11.1@489.62,1249 U3.13@572.24,1249
  Top Layer w20: C11.1@480,1245 L1.2@480,1340
NetC12_2: C12.2 U3.20 | length 49.2
  Top Layer w12: C12.2@620.47,1073 U3.20
NetC13_1: C13.1 U3.10 | length 40.4
  Top Layer w10: C13.1@635,1326 635,1309.82 640.16,1304.66 U3.10@640.16,1287.76
NetC14_2: C14.2 U4.31 | length 73.9
  Top Layer w10: C14.2 522.05,960.39 U4.31 U4.31@522.05,903.5
NetC25_2: C25.2 U4.47 | length 64.1
  Top Layer w10: C25.2@360,557.56 361.44,559 U4.47@423.54,559
NetC26_1: C26.1 U6.12 | length 179.8
  Top Layer w8: U6.12@922.8,1065.2 U6.12@925.47,1065.2
  Top Layer w9: U6.12@922.8,1065.2 910,1078 910,1101 920.06,1111.06 920.06,1157.89 927.38,1165.22 981.78,1165.22 C26.1@989,1158
NetC26_2: C26.2 U6.8 | length 147.6
  Top Layer w12: C26.2@1047,1161 1047,1125 1048,1124
  Top Layer w13: U6.8 1018.53,1039.53 1048,1069 1048,1124
NetC28_1: C28.1 U6.10 | length 73.4
  Top Layer w10: C28.1@947.56,1131.44 947.56,1128.44 964.84,1111.16 U6.10@964.84,1065.2
NetC29_1: C29.1 L3.1 U7.1 U7.2 | length 163.5
  Top Layer w10: 1009.31,1320.31 1031.19,1320.31 L3.1
  Top Layer w14: U7.2 U7.1 1009.31,1320.31
NetC30_1: C30.1 C31.1 RF1.5 U9.5 | length 209
  Bottom Layer w20: C31.1@358.53,229 C30.1 C30.1@397.38,232.38
  Bottom Layer w25: C31.1@358.53,229 C31.1 344.53,194.47 367.76,171.24 U9.5 ; RF1.5@393.52,315.04 RF1.5 398,293.56 398,233 C30.1@397.38,232.38
NetC34_1: C34.1 U9.4 | length 43.3
  Bottom Layer w20: C34.1 326.22,87.6 U9.4
NetCONN1_3: CONN1.3 R4.1 U4.29 | length 804.2
  Top Layer w8: 392.52,255.32 425.32,255.32 433.67,263.67 433.67,318.67 R4.1@450,335 ; CONN1.3 452.76,255 ; R4.1@455,335 468,348 468,497 495.91,524.91 495.91,541.52 544,589.6 544,648.67 538,654.67 538,681.33 541,684.33 541,789.4 561.42,809.81 U4.29@561.42,903.5
NetCONN1_4: CONN1.4 R3.1 U4.30 | length 855.6
  Top Layer w8: R3.1@375,375 R3.1@385,375 ; R3.1 R3.1@385,375 ; 393,295 388,295 377,306 377,367 R3.1@385,375 ; 466.08,296.08 492.13,270.04 CONN1.4 ; U4.30@541.73,903.5 541.73,812.76 525,796.02 525,690.96 522,687.96 522,648.04 528,642.04 528,596.23 479.91,548.14 479.91,531.91 451,503 451,386 440,375 R3.1@385,375
NetCONN3_3: CONN3.3 R7.2 | length 99.6
  Top Layer w8: R7.2@1138.62,365 1169.29,365 1203.97,399.68 CONN3.3
NetCONN3_4: CONN3.4 R6.2 | length 90
  Top Layer w8: R6.2@1149.5,401.5 1152.5,401.5 1190.06,439.06 CONN3.4
NetD2_1: D2.1 R1.2 | length 64.6
  Top Layer w12: D2.1 141.38,1123 R1.2
NetD3_1: D3.1 R5.1 | length 80.1
  Top Layer w12: D3.1 318.62,347.87 318.62,403.62 R5.1@328,413
NetD4_1: D4.1 R20.1 | length 68.8
  Top Layer w8: R20.1 326.38,250 D4.1@331.5,250
NetIC1_3: P2.1
NetIC1_4: 
NetIC1_5: JP9.2
NetIC1_8: P3.1
NetIC1_10: P1.1
NetJP8_1: P2.2
NetJP9_1: JP9.1 P2.3 | length 748
  Bottom Layer w8: 718,550 718,517 755,480 781.59,480 812.1,449.49 812.1,387.13 833.23,366 854,366 868,352 868,316.06 951.19,232.88 951.19,139.15 1006.34,84 1079,84 1118,45 JP9.1
NetR2_2: R2.2 U3.8 U4.20 | length 585.2
  Top Layer w8: U3.8@679,1272 679,1295 713,1329 752.77,1329 790,1291.77 790,1066.77 738,1014.77 738,893 U4.20@739,892
NetR15_2: R15.2 U4.55 U8.1 | length 789.3
  Top Layer w8: R15.2@588,374.62 R15.2 ; v1(588.29,408.08) 596.31,408.08 620.47,432.24 U4.55@620.47,466.5 ; R15.2@600,368.62 R15.2@600,373 ; U4.55@620,466.02 U4.55@620.47,466.5 ; U4.55 U4.55@620.47,466.5
  Top Layer w12: R15.2@588,374.62 v1@588,407
  Power w8: v1(588.29,408.08) 588.29,412.29 621,445 675.43,445 698.43,422 872,422 v1(873,423)
  Bottom Layer w8: v1(873,423) 873,420 884,409 884,322.69 958.69,248 1049,248 1078.5,218.5 U8.1@1078.5,208.5
NetR16_2: R16.2 U4.62 U6.16 U7.7 | length 472.5
  Top Layer w8: U4.62@758.27,466.5 U4.62 758.27,507.27 v1(778,527) ; v1(816,1121) 816,1141 875,1200 899,1200 922.61,1223.61 U7.7 ; v3(870,987) 876.53,980.47 U6.16@904.8,980.47
  Bottom Layer w8: R16.2@814.38,527 R16.2
  Bottom Layer w10: v1(816,1121) 816,1038.82 867.82,987 v3(870,987)
  Bottom Layer w12: v1(778,527) R16.2@814.38,527
NetR17_2: R17.2 U4.61 U6.1 U7.8 | length 594.8
  Top Layer w8: U4.61 739,468.91 739,524.77 777.23,563 v1(778,563)
  Top Layer w10: U6.1@925.47,959.8 925.47,955.47 914,944 873,944 843,974 843,1143 883,1183 927,1183 971.82,1227.82 U7.8
  Bottom Layer w12: v1(778,563) 786,571 R17.2
  other v3: 870,951
NetR18_2: R18.2 RF1.13 U4.50 | length 849.3
  Top Layer w8: U4.50@522.05,466.5 U4.50 522.05,505.42 528,511.37 528,528.35 576,576.35 576,616 650.28,690.28 655.28,690.28 659.24,694.24 659.24,694.15 v1(655.09,690)
  Top Layer w10: U4.50@522.05,466.5 522.05,400.14 528,394.18 R18.2@543.56,378.62
  Power w8: v1(470,866) 485.29,866 494.29,875 610.71,875 641,844.71 641,784 677,748 677,711.91 v1(655.09,690)
  Bottom Layer w10: v1@474,875 474,921.4 475.3,922.7 RF1.13@472.26,922.7 ; RF1.13@472.26,922.7 460,922.7 472.26,934.96 RF1.13 RF1.13@472.26,922.7
NetR19_1: R19.1 RF1.14 U4.54 | length 775.7
  Top Layer w8: U4.54@601,466.71 601,504.57 621.43,525 643,525 v1(666,548)
  Top Layer w10: U4.54@600.79,466.5 U4.54@601,466.71
  Power w8: v1@550,992 v1(550,990) 550,984 673,861 673,799 698,774 698,699.43 716,681.43 716,656.57 711,651.57 711,586 673,548 v1(666,548)
  Bottom Layer w8: RF1.14@551,934.96 R19.1@551,1036
  Bottom Layer w10: RF1.14@551,919 RF1.14 RF1.14@551,934.96
NetR22_2: R22.2 U4.11 | length 258.5
  Top Layer w8: v1(806,799) 806,770 818,758 818,747 828.79,736.21 U4.11
  Bottom Layer w8: v1(806,799) 810,799 832,777 936.38,777 R22.2
NetRF1_3: RF1.3 RF1.7 | length 387.4
  Bottom Layer w8: RF1.7 236.04,309.04 297,370 458,370 478.59,349.41 510.59,349.41 551,309 RF1.3
NetRF1_4: RF1.4 RF1.6 | length 242.4
  Bottom Layer w8: RF1.6 314.78,309.78 355,350 435,350 472.26,312.74 472.26,305.04 RF1.4
  Bottom Layer w10: RF1.4 RF1.4@472.26,317.74 ; RF1.4@472.26,305.04 RF1.4@477,300.3
NetRF1_10: RF1.10 U4.52 U8.2 | length 1925.5
  Top Layer w8: v1(552.29,408.08) v1@552.29,411.29 ; U4.52 561.42,516.51 618,573.09 v1(618,585)
  Top Layer w10: v1@552.29,411.29 561.42,420.42 U4.52
  Power w8: v1(377,997) 377,824 460,741 460,582.57 477.57,565 544,565 563,584 v1@617,584 ; v1(552.29,408.08) 552.29,414.51 602.78,465 683.71,465 706.71,442 828,442 v1(838,452)
  Bottom Layer w8: RF1.10@236.04,944.96 237.96,944.96 260.77,967.77 261.77,967.77 290,996 v1@377,996 ; v1(552.29,408.08) v1@552.29,408.85 ; v1(838,452) 841,449 888,449 900,437 900,329.32 960.32,269 1061,269 1103,227 1103,137 1086,120 1048,120 U8.2@1021.5,146.5
NetRF1_11: RF1.11 U4.53 U8.5 | length 1383
  Top Layer w8: U4.53@581.1,466.5 U4.53 581.1,507.33 644,570.23 644,611 v1(641,614)
  Power w8: v1@306,865 439,732 439,575.29 469.29,545 620.43,545 648,572.57 648,607 v1(641,614)
  Bottom Layer w8: v1(306,867) 314.78,875.78 RF1.11 RF1.11@314.78,934.96 ; v1(641,614) 651.23,614 666.23,629 722.23,629 730.23,637 751.77,637 791.99,596.78 884.55,596.78 927.67,553.67 927.67,496.67 919,488 U8.5@919,373.49
NetRF1_12: RF1.12 U4.51 U8.6 | length 1313.2
  Top Layer w8: U4.51 U4.51@542,468.76 ; U4.51@542,464 U4.51@542,468.76 ; v1(686,669) 679,662 651,662 592,603 592,569.72 544,521.72 544,504.75 542,502.75 U4.51@542,468.76
  Power w8: v1@430,860 454,836 483.57,836 502.57,855 602.43,855 621,836.43 621,742.43 617,738.43 617,685.66 642.66,660 677,660 v1@683,666
  Bottom Layer w8: RF1.12@393.52,934.96 RF1.12 393.52,909.48 430,873 v1(430,862) v1@430,860 ; v1(686,669) 699,682 729.4,682 798.4,613 890.96,613 944,559.96 944,483.77 935,474.77 935,444.23 U8.6@977.62,401.62
NetU3_9: U3.9 U4.22 | length 592.2
  Top Layer w8: U3.9@659.84,1287.76 659.84,1319.84 v1(663,1323) ; U4.22@699.21,903.5 U4.22 699.21,972.02 685,986.23 685,1007.77 700.23,1023 723.6,1023 773,1072.4 773,1272 v1(742,1303)
  Bottom Layer w8: v1(663,1323) 668,1318 727,1318 v1(742,1303)
NetU3_12: U3.12 U4.24 | length 467.4
  Top Layer w10: v1@561,1282 U3.12@600,1282 ; v1(642,1038) 642,1036 652,1026 652,972.56 659.84,964.72 U4.24 U4.24@659.84,903.5
  Bottom Layer w10: v1@549,1286 549,1161 584,1126 584,1096 v1(642,1038)
  other v1: 561,1288
NetU3_23: U3.23 U4.21 | length 247.8
  Top Layer w8: v1@679.53,1060 U3.23 U3.23@679.53,1132.24 ; v1(711,997) 718.9,989.1 U4.21 U4.21@718.9,903.5
  Bottom Layer w8: v1(673,1060) 711,1022 v1(711,997)
NetU3_24: U3.24 U4.23 | length 245.6
  Top Layer w8: U4.23@679.53,903.5 U4.23 679.53,969.08 669,979.6 669,1019 699.21,1049.21 U3.24 U3.24@699.21,1132.24
NetU4_5: U4.5 X1.1 | length 152.2
  Top Layer w8: X1.1@942.24,547.76 X1.1@973,547.76
  Top Layer w10: U4.5@870.4,618 907,618 919,606 919,571 X1.1@942.24,547.76
NetU4_6: U4.6 X1.2 | length 117.7
  Top Layer w10: U4.6@870.72,638 913,638 923,628 968,628 973,633 X1.2@973,642.24
NetU4_59: U4.59 U6.15 | length 217.2
  Top Layer w8: U4.59@699.21,466.5 U4.59 699.21,513.79 692,521 692,550.23 692,562 v1(741,611) 744,614 v1@746,614 ; v3@869,1018 876.95,1018 894.79,1000.16 U6.15@904.8,1000.16
  other v3: 854,1031
NRST: C19.2 R8.1 U4.7 | length 933.8
  Top Layer w10: v1(814,653) 818.47,657.47 U4.7
  Power w8: v1@812.43,659 812.43,654.57 v1(814,653)
  Bottom Layer w8: v1@806.23,657 v1@807,657 ; v1(814,653) 809.23,653 766,696.23 766,751.77 781.23,767 806,767 816.78,756.22 925.16,756.22 R8.1 ; C19.2@941.38,690.62 970.81,661.19 1030.81,661.19 1062,630 1062,531.82 1093.82,500 1143,500 1169,474 1169,411.5 1185.81,394.69 1220.31,394.69
  Bottom Layer w10: C19.2@941.38,690.62 R8.1 ; 1220,395 1220.31,394.69 ; 1223.9,394.69 1220.31,394.69 ; 1225,390 1220.31,394.69
"PB12 = SPI2 NSS, CAN2 RX": U4.33
"PB13 = SPI2 SCK, CAN2 TX, USART3 CTS": U4.34
S1_IN: P4.2 U4.35
S2_IN: P4.1 U4.36
S3_IN: P4.4 U4.37
S4_IN: P4.3 U4.38
S5_IN: P4.6 U4.39
S6_IN: P4.5 U4.40
SERVO_OUT_1: JP1.1 U4.26 | length 748.7
  Top Layer w8: U4.26@620.47,903.5 620.47,869.64 633.03,857.09 812.78,857.09 823.54,867.85 950.43,867.85 952.85,865.44 1006.1,865.44 1008.29,867.64 1009.71,867.64 1011.9,865.44 1065.15,865.44 1074,874.29 1074,950 1085,961 1085,1023.23 1145,1083.23 JP1.1@1145,1090
SERVO_OUT_2: JP2.1 U4.27 | length 712
  Top Layer w8: U4.27@600.79,903.5 600.79,864.7 626.4,839.09 817.4,839.09 830.17,851.85 943.81,851.85 946.22,849.44 1071.78,849.44 1090,867.66 1090,937 JP2.1 JP2.1@1141.73,971.73
SERVO_OUT_3: JP3.1 U4.17 | length 378.8
  Top Layer w10: U4.17@797.64,903.5 801.14,900 v1@833,900
  Bottom Layer w10: v1@830,894 v1(831,894) 842,894 875,861 1121,861 JP3.1@1141.73,881.73 ; JP3.1@1141.73,880.73 JP3.1@1141.73,881.73 ; JP3.1 JP3.1@1141.73,881.73
SERVO_OUT_4: JP4.1 U4.16 | length 300.5
  Top Layer w10: U4.16 936.98,834.64 939.18,832.44 1072.56,832.44 1136.27,768.73 JP4.1
SERVO_OUT_5: JP5.1 U4.15 | length 367.8
  Top Layer w10: U4.15 869.02,814.44 1054.01,814.44 1086,782.46 1086,729 1141.73,673.27 JP5.1
SERVO_OUT_6: JP6.1 U4.14 | length 441.3
  Top Layer w10: U4.14 1041.92,795.27 1067,770.18 1067,718 1091.73,693.27 1091.73,627.27 1141.73,577.27 JP6.1
SONAR: U4.41
STAT: R5.2 U4.57 | length 586
  Top Layer w8: R5.2 281.38,425.38 292,436 v1@296,436 ; U4.57@659.84,466.5 660,466.34 660,432 679,413 v1(679,399) ; v1@296,436 299,436 v1(303,440) 296.67,435.13 v1@296,436
  Power w8: v1(303,440) 417,326 577,326 636,385 655.57,385 669.57,399 v1(679,399)
SWDCLK: CONN6.4 U4.49 | length 1557.8
  Top Layer w8: U4.49@502.36,466.5 U4.49 502.36,508.36 512,518 512,534.98 560,582.98 560,627.23 597.17,664.4 597.17,669.91 647,719.75 v1(647,726)
  Bottom Layer w8: v1(647,726) 649,728 649,793.77 694.23,839 836,839 851,824 1041,824 1079,786 1079,537.44 1100.44,516 1219,516 1280,455 1280,330 1265.94,315.94 CONN6.4 CONN6.4@1203.98,315.94
  Bottom Layer w10: CONN6.4@1217.84,322 CONN6.4
SWDIO: CONN6.3 U4.46 | length 1224.8
  Top Layer w8: v1(591,789) 605.35,789 616.35,800 679.23,800 693.23,786 735,786 780,741 v1(792,741)
  Top Layer w10: U4.46@434.23,579 470,579 486,595 v1(490,595)
  Power w8: v1@495,599 537.43,599 597,658.57 597,783 v1(591,789)
  Bottom Layer w8: v1@791,740 v1@802,740 ; v1(792,741) 801,741 v1@802,740 ; CONN6.3 1202.56,355.32 1153,404.87 1153,462.77 1133.77,482 1089.19,482 911,660.19 911,722 893,740 v1@802,740
TO_REGS: C2.1 C5.1 C6.1 C33.2 C35.1 C36.1 L4.1 U1.1 U1.3 U2.1 U2.3 U9.1 U9.3 | length 2126.6
  Top Layer w8: U2.1 337.84,1132.4 357.47,1112.77 357.47,1076.47 U2.3@340,1059
  Top Layer w20: C6.1@275.15,1168.38 323,1168.38 323,1137.16 U2.1
  Top Layer w25: C6.1@271,1172.53 C6.1@275.15,1168.38
  Top Layer w30: C6.1@271,1172.53 271,1228 v2@274,1231
  Power w20: v1@503,135 v1(505,135)
  Power w25: v2@281.5,1226.5 271.5,1226.5 169,1124 169,989.09 163,983.09 163,366 365.5,163.5 474.5,163.5 v1@503,135
  Bottom Layer w8: U1.1 428.84,1191.6 448.47,1211.23 448.47,1246.76 428.84,1266.4 U1.3
  Bottom Layer w18: L4.1@210,1180 C35.1@264.53,1180 ; C2.1@343.47,1190 U1.1@417.16,1190
  Bottom Layer w20: C35.1@268,1179 268,1176.53 C35.1@271,1173.53 ; C35.1@269,1171.53 C35.1@269.97,1172.5 ; C35.1@275.74,1178.26 280.47,1183 336.47,1183 C2.1@343.47,1190 ; U1.1@417.16,1190 U1.1 ; U9.3 490.6,87.6 505,102 v1(505,135) 505,156 498.6,162.4 U9.1
  Bottom Layer w25: v2@271,1220 271,1227 v2(272,1228)
  Bottom Layer w30: C35.1@269.97,1172.5 271,1172.5 C35.1@271,1173.53
  Bottom Layer w40: C35.1@268,1179 268,1217 v2@271,1220
UART1_RX: CONN4.4 U4.43 | length 864.3
  Top Layer w8: v1(564,668) 569,668 621,720 621,736.77 636.23,752 657.77,752 672.77,737 712,737 768,681 768,639.6 804.09,603.52 804.09,523.6 862.5,465.19 914.04,465.19 938,441.23 938,417 967,388 967,375 969,373
  Top Layer w10: U4.43 495.21,637.79 v1(502,631) ; CONN4.4 CONN4.4@1044.68,192.48
  Power w10: v1(502,631) 539,668 v1(564,668)
  Bottom Layer w10: v1(564,668) 572,668 v1@575,665
UART1_TX: CONN4.3 U4.42 | length 955.6
  Top Layer w8: v1@574.62,701.38 574.62,703.62 605,734 605,743.4 629.6,768 664.4,768 679.4,753 718.63,753 784,687.63 784,646.23 820.09,610.14 820.09,532.23 871.13,481.19 971.58,481.19 987.71,465.06 987.71,413.29 1020,381 1020,322.48
  Top Layer w10: U4.42 481.47,657.47 493,669 v1(496,669) ; CONN4.3 CONN4.3@1005.32,192.48
  Power w10: v1(496,669) 528,701 564,701 v1(567,704)
USB_D_N: R10.1 U4.44 | length 197.2
  Top Layer w10: R10.1@253,573 257,573 278,594 312.18,594 317.73,599.54 354.54,599.54 373.1,618.1 U4.44
USB_D_P: R11.1 U4.45 | length 144.5
  Top Layer w10: R11.1@305,555 331.54,581.54 367.54,581.54 384.42,598.42 U4.45
USB_PWR: CONN4.2 CONN5.1 JP1.2 JP2.2 JP3.2 JP4.2 JP5.2 JP6.2 L4.2 R12.1 | length 5225
  Top Layer w8: v2(220,1056) 249,1056 286.38,1018.62 R12.1@290,1018.62
  Top Layer w16: v2@220,479 v2@233,479
  Top Layer w16.5: CONN5.1@165.15,464 205,464 v2@220,479
  Top Layer w20: v2@413.39,66.61 v2@415,65 ; v2@964.57,64.43 v2(965,64)
  Top Layer w23: v2@413.39,66.61 413.39,191.1 ; v2@964.57,64.43 CONN4.2 ; 1223.9,360.32 v2@1325,360.32
  Top Layer w60: JP6.2 JP5.2 JP4.2 JP3.2 JP2.2 JP1.2
  Power w30: v2@219,1058 209,1048 209,498.6 v2(222.34,485.26)
  Power w55: 91,964 104,951 104,285.34 324.84,64.5 1074.5,64.5 1308,298
  Power w80: JP1.2 JP2.2 JP3.2 JP4.2 JP5.2 JP6.2 1241.73,521.6 1308,455.34 1308,298
  Bottom Layer w25: 81,974 90,965 ; 91.2,966.2 92.6,967.6
  Bottom Layer w30: 81,1001.28 81,1048
  Bottom Layer w40: 125,1126 125,1117 L4.2@199,1117 ; 166,1050 v2@215,1050
  Bottom Layer w50: JP6.2 JP5.2 JP4.2 JP3.2 JP2.2 JP1.2
  other v2: 415,60 1317,360
USB_R_N: CONN5.2 R10.2 | length 160.6
  Top Layer w10: CONN5.2@171.18,435 174.18,438 233,438 260,465 260,517.33 R10.2@255,522.33
USB_R_P: CONN5.3 R11.2 | length 191.5
  Top Layer w10: CONN5.3@170.59,410 172.59,412 237,412 272,447 272,447.18 291.82,467 292,467 305,480 R11.2@305,508
VBUS_SEN: R12.2 R14.2 U4.25 | length 572.9
  Top Layer w8: R12.2@290,971 R12.2@290.38,971.38 ; R12.2@290,971.38 R12.2@290.38,971.38 ; R12.2@295,971.38 R12.2@290.38,971.38 ; R14.2@329.5,1007.5 384,1062 v1@384,1092 ; R14.2@338.24,1019.24 R12.2@290.38,971.38 ; v1@600,1032 598,1030 598,989 640.16,946.84 U4.25 U4.25@640.16,903.5
  Power w8: v1@383,1093 v1(384,1093) 483.57,1093 517.57,1059 579,1059 600,1038 v1@600,1032
  other v1: 603,1032
VCC: C1.1 C3.1 C15.1 C16.2 C17.2 C18.1 C20.2 C21.1 C22.2 C23.1 C24.2 C27.1 D2.2 D3.2 D4.2 R2.1 R3.2 R4.2 R8.2 R15.1 R16.1 R17.1 R18.1 R19.2 R22.1 U1.5 U4.1 U4.13 U4.19 U4.32 U4.48 U4.64 U6.2 U6.4 U6.13 U8.3 U8.7 U8.8 | length 2564.2
  Top Layer w8: v1(248,378) 248,355.5 D3.2 ; C24.2@924,511 927,508 930,505 C24.2
  Top Layer w10: D3.2@251,327.53 D3.2 ; R3.2@380,423.62 R3.2 R3.2@390,433.62 ; v1(390,465) v1@396.38,465 ; v2@413,1007 v2@426,994 ; C15.1@456.62,917.38 C15.1@459,917.38 ; C15.1@457,916 U4.32@502,916 ; U4.19@758.27,903.5 U4.19 758.27,965.89 766.38,974 C16.2@765,975.38 ; C27.1@797.64,400.98 U4.64@797.64,466.5 ; C27.1@800,398.62 800.62,398 806,398 813,391 883,391 ; U4.13 941.04,775.58 C18.1 C18.1@952.62,764 ; U4.1@870.14,539 905,539 924,520 C24.2@924,511 ; 880,383.62 893.2,370.42 916.41,370.42 ; 910,913 914,917 ; 913.62,917 914,917 ; U6.2@945,954.8 945,948 914,917 ; C22.2@980.47,910 973.47,917 914,917 ; C22.2@984.53,928.06 U6.4 ; v1@1035,764 v1(1038,761)
  Top Layer w12: D2.2 65,1144.5 v1(65,1171) ; D3.2@251,327.53 251,268 D4.2@268,251 ; R4.2@495,335 R4.2@502,328 ; R18.1@548.38,328 R18.1@555,321.38 ; R15.1 R15.1@600,321.38 ; C16.2@765,975.38 v1(765,1005) 778.62,1005 R2.1
  Top Layer w15: R3.2@390,433.62 v1(390,465) ; v1@396.38,465 425,493.62 U4.48@425,536 ; v2@426,994 426,948 C15.1@456.62,917.38 ; R4.2@502,328 R18.1@548.38,328 ; R4.2@504,337 v1(504,376) ; R18.1@555,321.38 R15.1 ; v1(895,508) C24.2@927,508 ; v3(935,908) 941.53,908 946,912.47 964.47,894 C22.2@980.47,910 ; C18.1@952.62,764 v1@1035,764
  Top Layer w20: D4.2@268.5,241.5 D4.2@268.5,250
  Power w12: v2(423,1010) v2@423,1018
  Bottom Layer w8: v2@414,994 489,994 511,1016 R19.2@511,1035 ; U8.3@975,147 1022,100 1107,100 1112,95
  Bottom Layer w10: R16.1 R16.1@868,528 ; v1@894.62,514 896,514 v1@900,510 ; U8.3@975,147 U8.3@975,170.51 ; R8.2 1017,740 v1(1038,761) 1017,782 R22.1
  Bottom Layer w12: U8.7@1019.73,370 U8.8@1076,370 ; C20.2@1072.62,442 C20.2@1075,442 ; U8.8@1075,379.49 C20.2@1075,442 ; v1@1125,455 1112,442 C20.2@1075,442 ; 1128,94 v1@1128,214
  Bottom Layer w15: R16.1 R17.1 ; R16.1@868,528 886,510 v1@900,510
  Bottom Layer w25: v2@414,1007 420,1013 C3.1@420,1113 ; C3.1 428.47,1124.15 495.92,1191.6 U1.5
  other v1: 1129,215 844,392 1127,452
  other v3: 859,1085
VCC_ANA: C4.1 C7.1 L1.1 L3.2 U2.5 | length 1081
  Top Layer w12: L3.2@1063,1208 1069,1214 v1(1122,1214)
  Top Layer w30: U2.5@422.24,1135 L1.1@422.24,1339
  Power w12: v1@422,1294 422,1302 475,1355 1028,1355 1121,1262 v1@1121,1214
  other v1: 421,1302
VOLT: R6.1 U4.10 | length 38
  Top Layer w8: R6.1@1093,404 1093,442
WARN: R20.2 U4.56 | length 625.4
  Top Layer w8: R20.2@323.62,295 R20.2 341.94,308.31 351.15,308.31 358.18,315.34 358.18,435.82 340,454 v1(339,454) ; v1@640,417 640,466.34 U4.56@640.16,466.5
  Power w8: v1(339,454) 339,436 429,346 568.72,346 639.72,417 v1@640,417
  other v1: 640,415
pads on no net: CONN1.0 CONN1.2 CONN3.0 CONN3.1 CONN3.2 CONN4.0 CONN5.4 CONN6.0 CONN6.2 J1.1 J1.2 J1.3 J1.4 J1.5 RF1.8 U3.2 U3.3 U3.4 U3.5 U3.6 U3.7 U3.14 U3.15 U3.16 U3.17 U3.19 U3.21 U3.22 U4.2 U4.3 U4.4 U4.58 U6.3 U6.5 U6.6 U6.7 U6.14 U7.5 U7.6
copper on no net: | length 1307.8
  Top Layer w8: 434.65,677 467.2,677 495,704.8 v1@495,733 ; v1@561,746 v1(567,740) 578.98,740 622.98,784 672,784 687,769 725.25,769 779.25,715 806.77,715 808.77,717 868,717 ; 868.5,716.53 908.32,716.53 936.22,688.63 968.37,688.63 976,681 1053.63,681 1073,661.63 1073,497.37 1052.67,477.04 1052.67,447.67 1046.32,441.32 1027.52,441.32 ; 941,291 942,290 942,279 956,265 996,265 1010,279 ; v1@1014,513 v1(1014,509) 1014,503 1003.71,492.71 1003.71,470.2 1011.91,462 1015.35,462
  Top Layer w15: 1100,266.38 1131.38,266.38 1185.94,320.94 1223.9,320.94
  Power w8: v1(499,729) 504,729 515,740 v1(567,740)
  other v1: 1133,251 993,300 1168,316

## Polygon pours and split planes (outlines as drawn)
GND on Bottom Layer "Bottom Layer-GND" (solid, remove dead copper, shelved, pour order 10): 1.73,110 1.73,1310.79 cw(c110,1310.79) 110,1419.06 1310.79,1419.06 cw(c1310.79,1310.79) 1419.06,1310.79 1419.06,110 cw(c1310.79,110) 1310.79,1.73 110,1.73 cw(c110,110)
GND on Top Layer "Top Layer-GND" (solid, remove dead copper, shelved, pour order 9): 1.73,110 1.73,1310.79 cw(c110,1310.79) 110,1419.06 1310.79,1419.06 cw(c1310.79,1310.79) 1419.06,1310.79 1419.06,110 cw(c1310.79,110) 1310.79,1.73 110,1.73 cw(c110,110)

## Keep-outs
Top Layer:
  circle w3.94: c1310.79,1310.79 r59.06
  circle w3.94: c1310.79,1310.79 r106.3
  circle w3.94: c110,1310.79 r106.3
  circle w3.94: c110,1310.79 r59.06
  circle w3.94: c1310.79,110 r106.3
  circle w3.94: c1310.79,110 r59.06
  circle w3.94: c110,110 r106.3
  circle w3.94: c110,110 r59.06
Bottom Layer:
  circle w3.94: c1310.43,111.73 r106.3
  circle w3.94: c110.43,111.73 r106.3
  circle w3.94: c110.43,1311.73 r106.3
  circle w3.94: c1310.43,1311.73 r106.3
Keep-Out Layer:
  the board outline again, w10

## Other copper
Top Layer:
  rectangle net GND: 1014,567 1045,629
  pour cut-out: 134,373 134,350 197,350 197,373
  pour cut-out: 101.17,475.41 101.17,350.41 128.72,350.41 129,350.13 129,475.87
  pour cut-out: 905,526 905,660 1055,660 1055,526
  pour cut-out: 890,1074 890,947 1019,947 1019,1074
Ground:
  pour cut-out: 890,1074 890,947 1019,947 1019,1074
  pour cut-out: 1190,1140 1295,1140 1295,515 1190,515
Power:
  pour cut-out: 890,1074 890,947 1019,947 1019,1074
  pour cut-out: 1103.97,1150 1102.97,823 1101.97,500 1416.03,500 1416.97,500.94 1416.97,1150
  pour cut-out: 647.5,375.5 642.5,110.5 772.5,110.5 772.5,375.5
Bottom Layer:
  pour cut-out: 890,1074 890,947 1019,947 1019,1074

## Silkscreen, mask and mechanical layers (free items; w line width, h text height)
Top Overlay:
  circle w10: c970,330 r5
  text "F" at 607,1359 h150
  text "" at 226.38,1320 h137.8
  text "" at 1104.33,1320 h137.8
  text "Sig" at 1110,1170 h50
  text "-" at 1329,1162 h90
  text "+" at 1223,1158 h80
  text "Pow" at 17,1157 h60
  text "1" at 1037,1067 h65
  text "2" at 1037,967 h65
  text "3" at 1037,839 h65
  text "4" at 1037,750 h65
  text "5" at 1037,650 h65
  text "10" at 201,607 h50
  text "6" at 1037,550 h65
  text "S" at 380,321 h60
  text "W" at 184,232 h60
  text "Pwr Sen" at 1202,212 h50
  text "Sonar" at 1211,181 h50
  text "Flexi" at 195,145 h55
  text "Port" at 205,105 h55
  text "Port" at 1120,105 h55
  text "GPS" at 954,-112.59 h50
Bottom Overlay:
  lines w7: 1130,1165 1145,1150 ; 1145,1210 1145,1150 ; 1160,1165 1145,1150
  text "Sig" at 1190,1230 h80
  text "-" at 1331.73,1191.73 h90
  text "+" at 1226.73,1186.73 h80
  text "C" at 786,1184 h160
  text "A" at 1063,1179 h260
  text "www.OpenPilot.org" at 35,452.76 h60 r270
  text "GND" at 1175,425 h30
  text "NRS" at 1175,390 h30
  text "IO" at 1175,350 h30
  text "CLK" at 1175,305 h30
  text "SWD" at 1325,180 h40
  text "3.3V" at 1086,87 h50
  text "BL" at 1162,41 h50 r270
Mechanical 1:
  the board outline again, w10
Mechanical 15:
  lines w7: 605,1077.17 605,1287.17 815,1287.17 815,1077.17 605,1077.17
Mechanical 16:
  lines w10: 240,710 415,710 415,985 240,985 240,710

## Dimensions
1.73,-17.95 to 1419.06,-27.79 on Dimensions
110,-17.95 to 1310.79,-17.95 on Dimensions
-17.95,110 to -17.95,1310.79 on Dimensions
-17.95,1.73 to -17.95,1419.06 on Dimensions
1269.03,1352.55 to -2430,-1943 on Dimensions

## Text inside footprints (layer, text, board x,y; h text height)
P4: Top Overlay "8" at 155,597 h50 r270; Top Overlay "7" at 55,597 h50 r270; Top Overlay "1" at 55,1037 h50 r270; Top Overlay "2" at 155,1057 h50 r270